# Altium PCB PCB_V1.0.PcbDoc (part 1 of 3)
Units mil, origin at the board's own origin, x right, y up, seen from the top; angles counter-clockwise.
Board outline 2129.51 x 1160.38 mil, 4 copper layers (L1, L2(GND), L3(PWR), L4), stack 62.45 mil thick; 40 components, 40 nets, 186 pads, 192 vias.
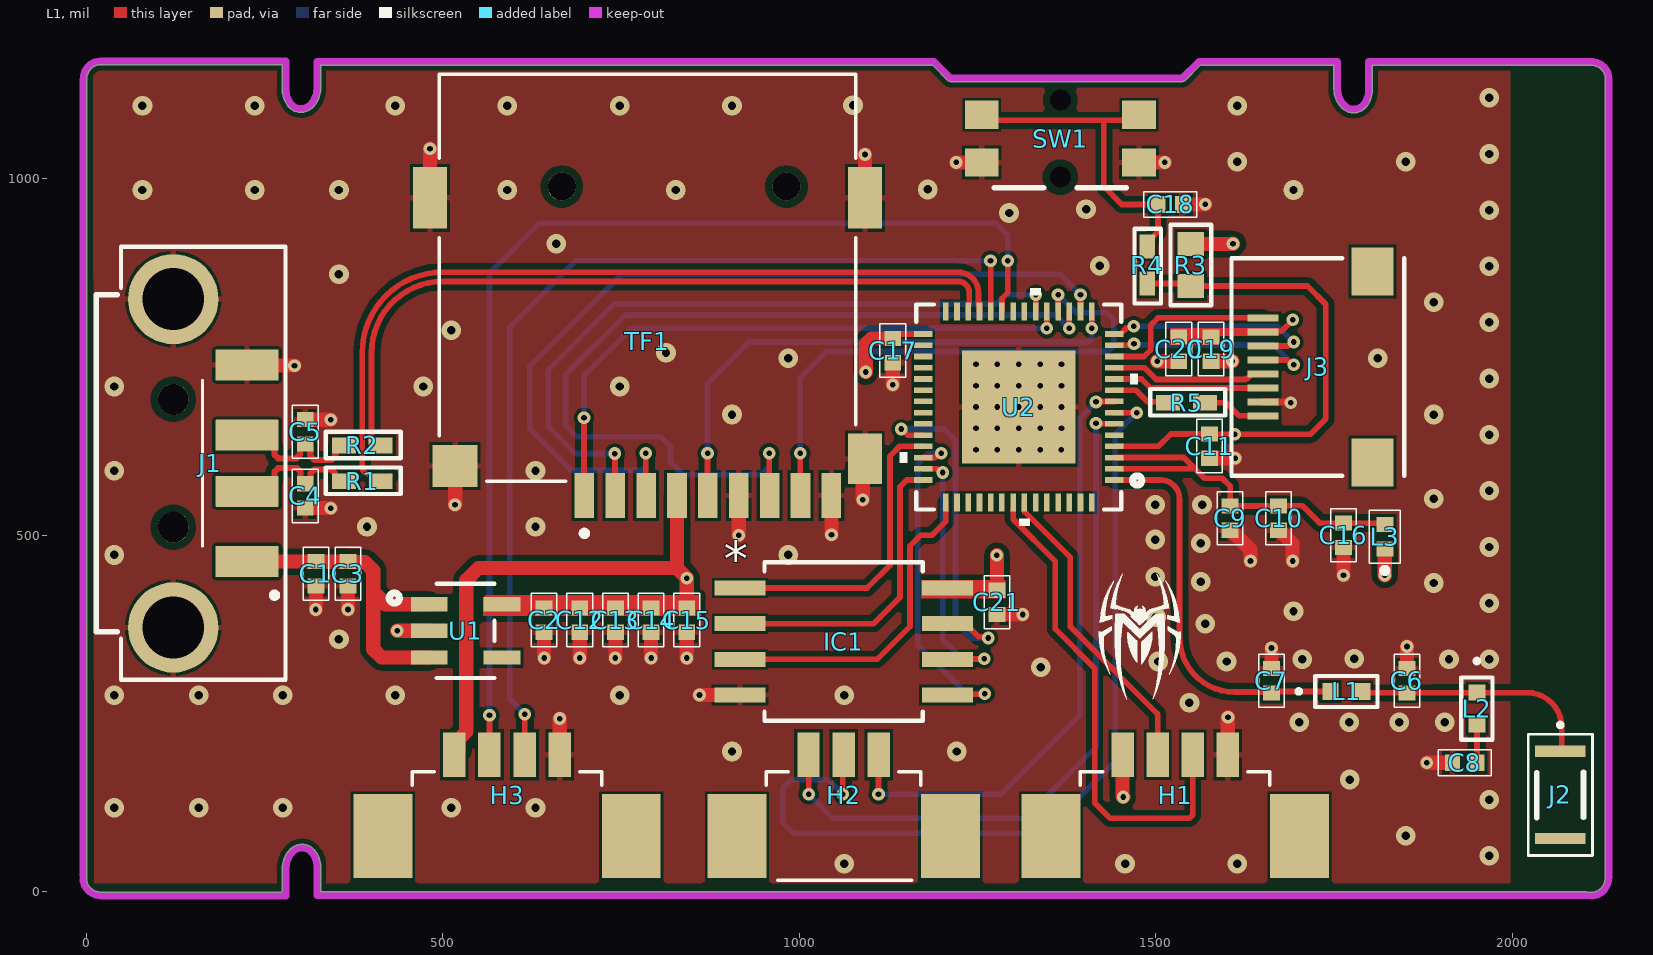
[diagram p0: L1 view]
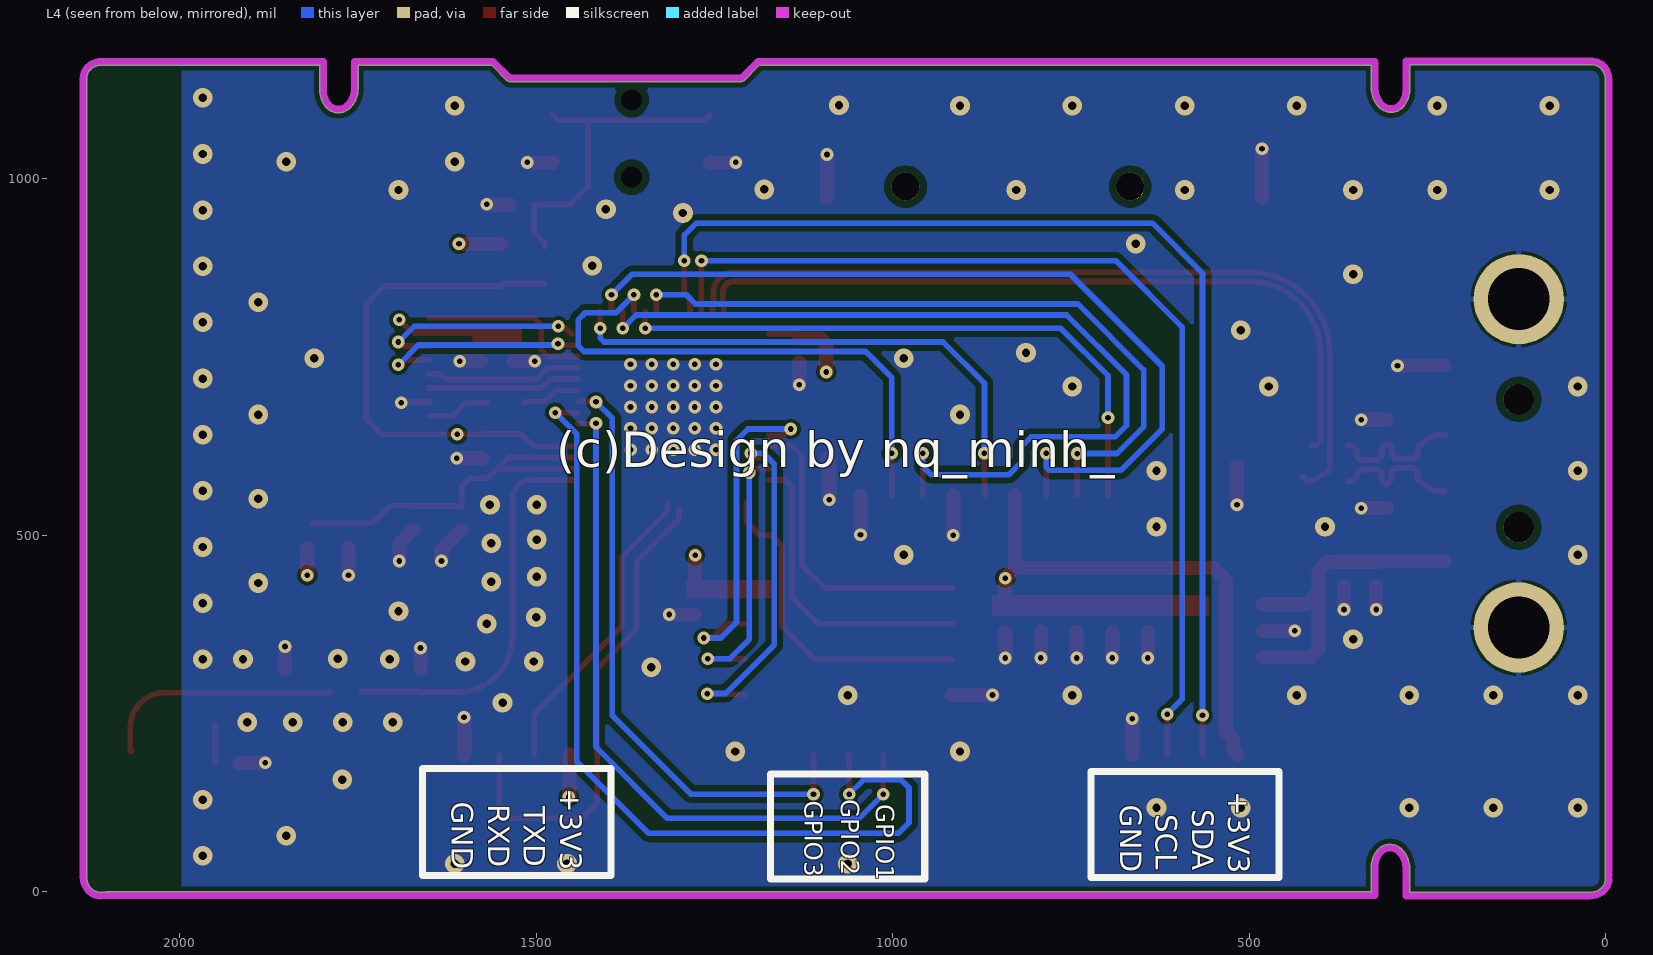
[diagram p1: L4 view, seen from below]
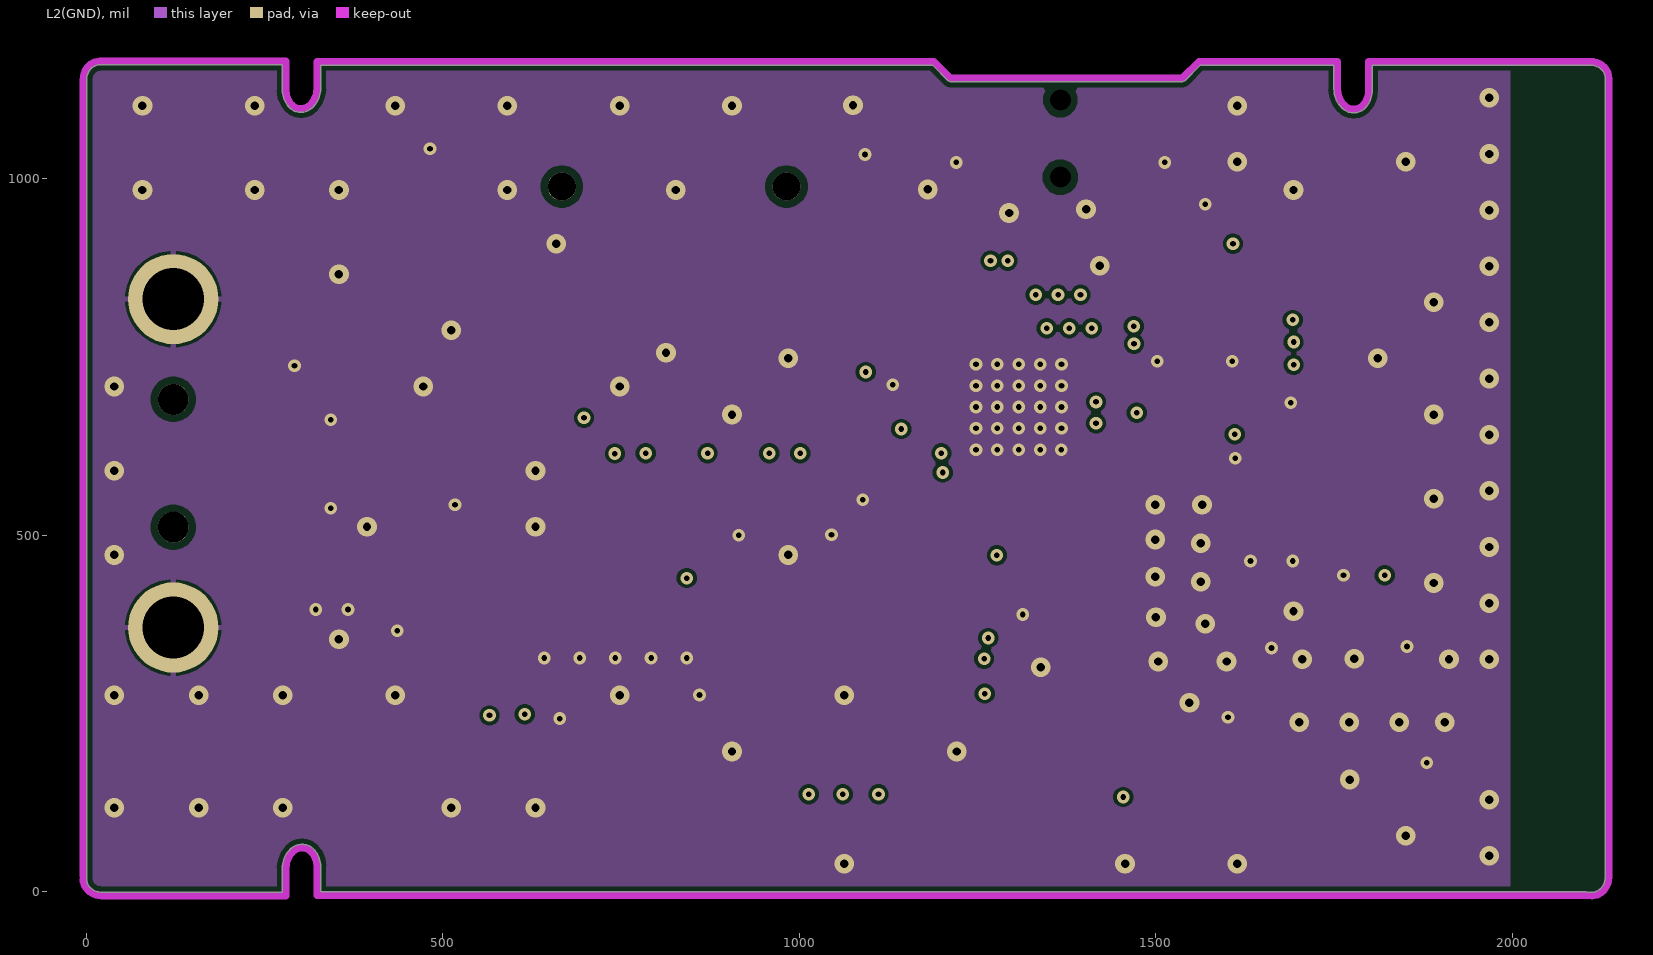
[diagram p2: L2(GND)]
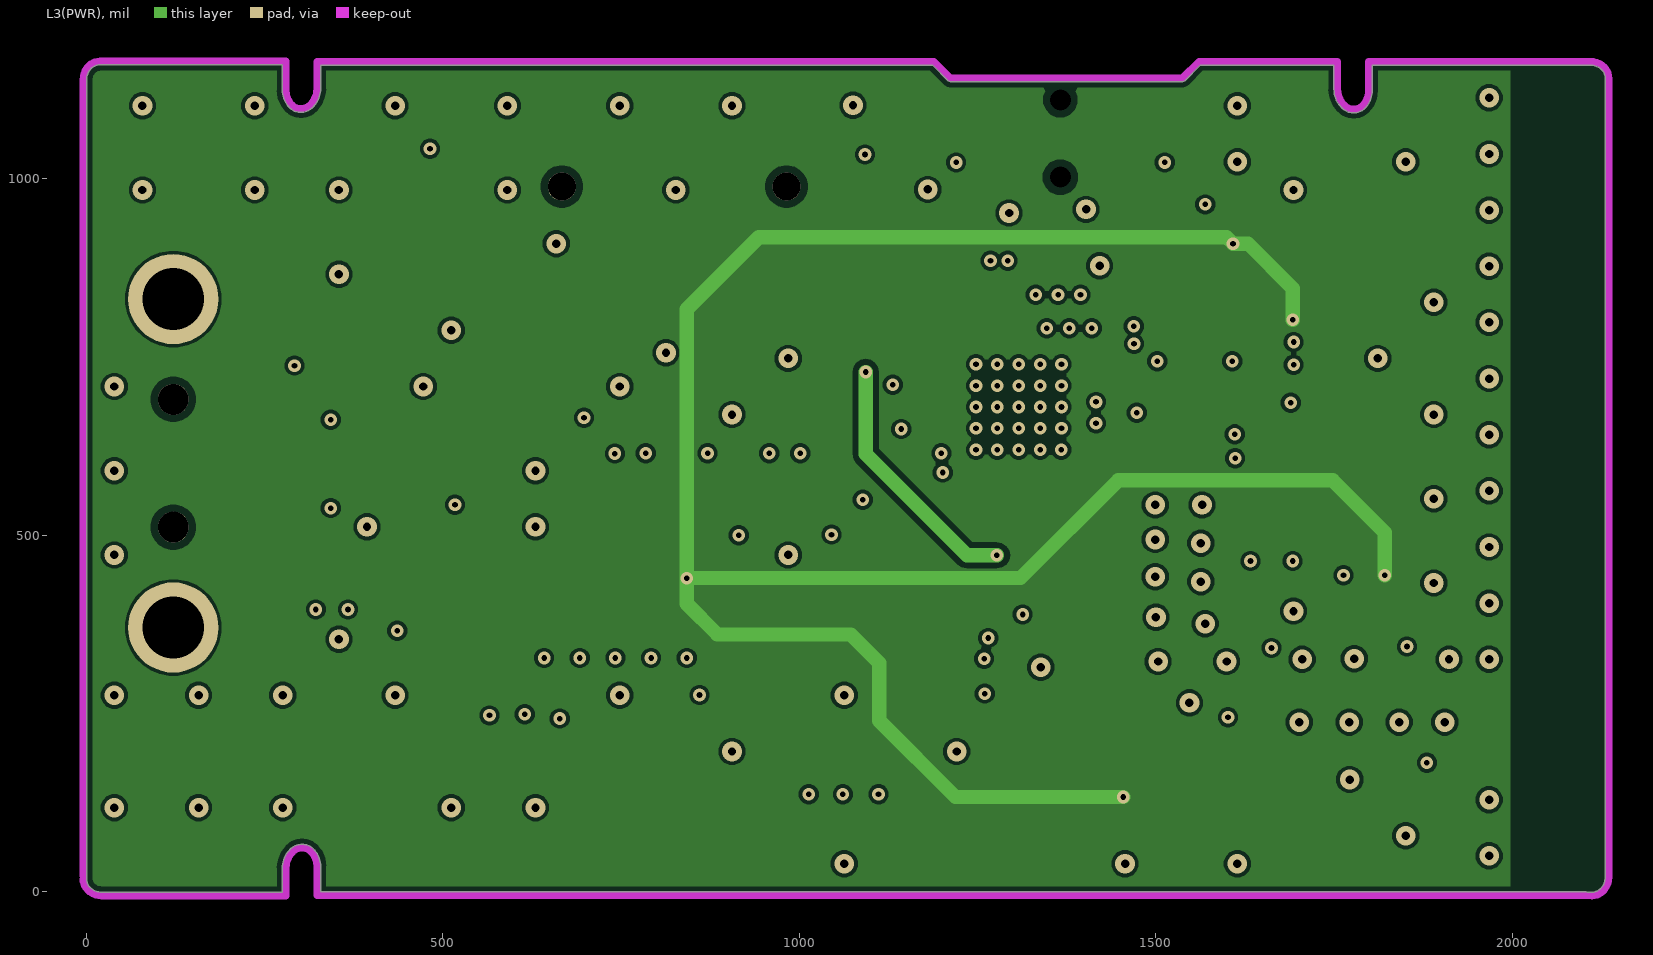
[diagram p3: L3(PWR)]

## Layer stack, top to bottom
Top Solder: solder mask 0.4, Solder Resist, Dk 3.5
L1: signal copper 1.38
Dielectric 2: prepreg 8.28, 7628, Dk 4.1
L2(GND): signal copper 0.6
Core: core 41.93, FR-4, Dk 4.8
L3(PWR): signal copper 0.6
Dielectric 3: prepreg 8.28, 7628, Dk 4.1
L4: signal copper 1.38
Bottom Solder: solder mask 0.4, Solder Resist, Dk 3.5

## Board outline
0.47,18.21 ccw(c17.69,18.21) 5.52,6.03 5.54,6.01 ccw(c21.28,21.8) 21.28,-0.5 275.02,-0.5 275.02,33.39 cw(c312.11,33.39) 285.89,59.62 cw(c302.97,42.53) 302.97,66.69 cw(c302.97,44.61) 318.58,60.22 cw(c294.35,35.99) 328.62,35.99 328.62,-0.12 2103.11,-0.12 2105.02,-0.5 2111.28,-0.5 ccw(c2111.28,16.72) 2123.45,4.55 2123.47,4.57 ccw(c2107.69,20.31) 2129.99,20.31 2129.98,1142.7 ccw(c2112.89,1140.66) 2125.06,1152.84 2125.04,1152.86 ccw(c2109.29,1137.07) 2109.29,1159.37 1803.19,1159.37 1803.19,1123.07 cw(c1768.92,1123.07) 1793.15,1098.84 cw(c1777.54,1114.45) 1777.54,1092.37 cw(c1777.54,1116.52) 1760.46,1099.44 cw(c1786.68,1125.67) 1749.59,1125.67 1749.59,1159.37 1562.46,1159.37 1540.55,1137.45 1537,1135.98 1212,1135.98 1208.45,1137.45 1186.54,1159.37 328.62,1159.37 328.62,1126.48 cw(c291.54,1126.48) 317.76,1100.25 cw(c300.68,1117.34) 300.68,1093.18 cw(c300.68,1115.26) 285.06,1099.65 cw(c309.3,1123.88) 275.02,1123.89 275.02,1159.88 19.33,1159.88 ccw(c19.33,1142.66) 7.15,1154.84 7.13,1154.82 ccw(c22.92,1139.07) 0.62,1139.07

## Design rules (kind name [scope] priority, off if disabled: settings)
BoardOutlineClearance [All] p1: gap=7.87 ignorepadtopadclearanceinfootprint=FALSE
Clearance [All] p1: gap=4 ignorepadtopadclearanceinfootprint=FALSE except(5: Arc-Via Track-Via SMDPad-Via THPad-Via Via-Via Via-Fill Via-Poly Via-Region Via-Text; 8: Arc-Fill Arc-Poly Arc-Region Track-Fill Track-Poly Track-Region Fill-Fill Fill-Poly Fill-Region Poly-Poly Poly-Region Region-Region; 9.84: Arc-Hole Track-Hole SMDPad-Hole THPad-Hole Via-Hole Fill-Hole Poly-Hole Region-Hole Text-Hole)
ComponentClearance [All] p1: gap=4 collisioncheckmode=3 verticalgap=4 showdistances=TRUE
DiffPairsRouting DiffPairsRouting_90 [All] p1: maxlimit=10 minlimit=5 mostfreqgap=5 toplayer_minwidth=8 toplayer_maxwidth=15 toplayer_prefwidth=8.5 midlayer1_minwidth=8 midlayer1_maxwidth=15 midlayer1_prefwidth=8.5 midlayer2_minwidth=8 midlayer2_maxwidth=15 midlayer2_prefwidth=8.5 bottomlayer_minwidth=8 bottomlayer_maxwidth=15 bottomlayer_prefwidth=8.5 maxuncoupledlength=500
DiffPairsRouting [All] p2: maxlimit=4 minlimit=4 mostfreqgap=4 toplayer_minwidth=4 toplayer_maxwidth=71497.94 toplayer_prefwidth=4 midlayer1_minwidth=4 midlayer1_maxwidth=71497.94 midlayer1_prefwidth=4 midlayer2_minwidth=4 midlayer2_maxwidth=71497.94 midlayer2_prefwidth=4 bottomlayer_minwidth=4 bottomlayer_maxwidth=71497.94 bottomlayer_prefwidth=4 maxuncoupledlength=500
Height [All] p1: minheight=0 maxheight=71497.94 prefheight=500
HoleSize [All] p1: absolutevalues=TRUE maxlimit=248.03 minlimit=7.87 maxpercent=80.000 minpercent=20.000
HoleToHoleClearance [All] p1: gap=9.84 allowstackedmicrovias=FALSE
MinimumAnnularRing [All] p1: minimumring=3
MinimumSolderMaskSliver [All] p1: minsoldermaskwidth=0
PlaneClearance [All] p1: clearance=6
PlaneConnect PlaneConnectPowerPads [InPadClass('PowerPads')] p1: planeconnectstyle=Direct reliefexpansion=20 reliefentries=4 reliefconductorwidth=10 reliefairgap=10
PlaneConnect [All] p2: pad.planeconnectstyle=Relief pad.reliefexpansion=11.81 pad.reliefentries=4 pad.reliefconductorwidth=4 pad.reliefairgap=4 via.planeconnectstyle=Direct via.reliefexpansion=11.81 via.reliefentries=4 via.reliefconductorwidth=5 via.reliefairgap=5
PolygonConnect PolygonConnectPowerPads [All vs (InPadClass('PowerPads'))] p1: connectstyle=Direct reliefconductorwidth=10 reliefentries=4 polygonreliefangle="90 Angle" airgapwidth=10
PolygonConnect [All] p2: thpad.connectstyle=Relief thpad.reliefconductorwidth=8 thpad.reliefentries=4 thpad.polygonreliefangle="90 Angle" thpad.airgapwidth=4 smdpad.connectstyle=Relief smdpad.reliefconductorwidth=8 smdpad.reliefentries=4 smdpad.polygonreliefangle="90 Angle" smdpad.airgapwidth=4 via.connectstyle=Direct via.reliefconductorwidth=5 via.reliefentries=4 via.polygonreliefangle="90 Angle" via.airgapwidth=5
RoutingVias [All] p1: holewidth=7.87 width=17.72 viastyle="Through Hole" minholewidth=7.87 minwidth=17.72 maxholewidth=248.03 maxwidth=257.87
SilkToSilkClearance [All] p1: silktosilkclearance=0
SilkToSolderMaskClearance [IsPad] p1: minsilkscreentomaskgap=4 clearancetoexposedcopper=TRUE
SolderMaskExpansion [All] p1: expansion=2.95 istentingtop=FALSE
SupplyNets "Schematic Supply Nets_5" [InNet('+3V3')] p1: voltage=0.000
SupplyNets "Schematic Supply Nets_3" [InNet('P3V3')] p2: voltage=0.000
SupplyNets "Schematic Supply Nets_2" [InNet('GND')] p3: voltage=0.000
SupplyNets "Schematic Supply Nets_1" [InNet('VDD_SPI')] p4: voltage=0.000
SupplyNets "Schematic Supply Nets" [InNet('+5V_USB')] p5: voltage=0.000
Width [All] p1: maxlimit=71497.94 minlimit=5 preferedwidth=8
20 further rules are at their usual default settings.

## Classes and differential pairs
differential pair class "Diff 90": USB USB_D
component class USB_and_POWER: C1 C2 C3 C4 C5 J1 R1 R2 U1
component class SD_Card: TF1
component class MCU_and_Antenna: C6 C7 C8 C9 C10 C11 C12 C13 C14 C15 C16 C17 C18 H1 H2 H3 J2 L1 L2 L3 R3 R4 SW1 U2
component class EEPROM: C21 IC1
component class Display: C19 C20 Display1 J3 R5
differential pair USB: +USB_P -USB_N
differential pair USB_D: +USB_D_P -USB_D_N

## Components (designator, comment, footprint, x,y, rotation, side; value= is the part's Value field where it differs from the comment)
C1 "GRM155R71C104KA88D" CAPC1005X55N 322,446 r90 top value=100nF
C2 "GRM155R60J106ME15D" CAPC1005X55N 642,381 r90 top value=10µF
C3 "GRM155R60J106ME15D" CAPC1005X55N 367,446 r90 top value=10µF
C4 "GRM155R60J106ME15D" CAPC1005X55N 307,555.17 r90 top value=10µF
C5 "GRM155R60J106ME15D" CAPC1005X55N 307,645.17 r270 top value=10µF
C6 "GJM1555C1H1R3BB01D" CAPC1005X55N 1852,296 r270 top value=1.3pF
C7 "GJM1555C1H1R2WB01D" CAPC1005X55N 1662,296 r270 top value=1.2pF
C8 "C0402-NC" "CAPC1005X55N - NC" 1933,181 r0 top
C9 "GRM155R71C104KA88D" CAPC1005X55N 1604,524 r270 top value=100nF
C10 "GRM155R71C104KA88D" CAPC1005X55N 1672,524 r270 top value=100nF
C11 "GRM155R71C104KA88D" CAPC1005X55N 1575,625 r270 top value=100nF
C12 "CL05A105KP5NNNC" CAPC1005X55N 692,381 r90 top value=1µF
C13 "CL05A105KP5NNNC" CAPC1005X55N 742,381 r90 top value=1µF
C14 "CL05A105KP5NNNC" CAPC1005X55N 792,381 r90 top value=1µF
C15 "GRM155R60J106ME15D" CAPC1005X55N 842,381 r90 top value=10µF
C16 "GRM155R71C104KA88D" CAPC1005X55N 1763,500 r270 top value=100nF
C17 "GRM155R60J106ME15D" CAPC1005X55N 1131,759 r90 top value=10µF
C18 "CL05A105KP5NNNC" CAPC1005X55N 1520,964 r0 top value=1µF
C19 "GRM155R60J106ME15D" CAPC1005X55N 1577,761 r90 top value=10µF
C20 "GRM155R71C104KA88D" CAPC1005X55N 1532,761 r270 top value=100nF
C21 "GRM155R60J106ME15D" CAPC1005X55N 1277,406 r90 top value=10µF
H1 "10114830-10104LF" AMPHENOL_10114830-10104LF 1527,86 r0 top
H2 "10114830-11103LF" AMPHENOL_10114830-11103LF 1062,86 r0 top
H3 "10114830-10104LF" AMPHENOL_10114830-10104LF 590,86 r0 top
IC1 "W25Q128JVSIQ TR" SOIC_208MIL_WIN-M 1062,351 r0 top
J1 "USB-AM-S-S-B-SM1" SAMTEC_USB-AM-S-X-X-SM1 122,601 r270 top
J2 "RF Antennas" ANT3216LL00R2400A 2067,136 r270 top
J3 "XF2M-0815-1A" "FPC CONNECTOR 8PIN, PITCH 0.5MM + MODULE_DISPLAY 1.14 INCH" 1727,736 r270 top
L1 "MHQ1005P2N7CT000" IND_1005_TDK 1767,281 r0 top value=2.7nH
L2 "L0402_NC" IND_1005_TDK_NC 1950,257 r270 top
L3 "LQG15HN2N0C02D" INDC1005X55N 1821,498 r270 top value=2nH
R1 "RC0402JR-070RL" RC0402N_YAG-M 387,576 r0 top value=0Ω
R2 "RC0402JR-070RL" RC0402N_YAG-M 387,626 r0 top value=0Ω
R3 "CRCW060310K0FKEA" RES_CRCW_0603 1549,879 r270 top value=10kΩ
R4 "RC0402JR-070RL" RC0402N_YAG-M 1488,879 r270 top value=0Ω
R5 "RC0402JR-070RL" RC0402N_YAG-M 1543,686 r0 top value=0Ω
SW1 "436331045822" 436331045822 1366,1076 r180 top
TF1 "SDCard Connetor_MSD-1-A" CUI_MSD-1-A 787,861 r180 top locked
U1 "MIC5504-3.3YM5-TR" SOT-23-5_MC_MCH 532,366 r0 top
U2 "ESP32-S3-PICO-1-N8R2" QFN56_7X7_EXP-L 1307.63,679.86 r180 top

## Footprints (in the part's own frame and the unit in brackets; to place one, negate y for a bottom-side part, rotate by r counter-clockwise, add the part's x,y. Pads: shape width x height; smd on the part's side, far side on the other; paste and mask are expansions set on the pad)
436331045822 [mm]
  rect 1.2x1 smd: 1(2.8,1.35) 2(2.8,-0.35) 3(-2.8,1.35) 4(-2.8,-0.35)
  round 0.375 hole 0.75 unplated: MH1(0,1.875) MH2(0,-0.875)
  silkscreen extent -2.35,2.25 2.35,2.25, body extent -3.2,-2.24 3.2,2.26, height 1.65
AMPHENOL_10114830-10104LF [mm]
  rect 0.8x1.6 smd: 1(-1.875,2.7) 2(-0.625,2.7) 3(0.625,2.7) 4(1.875,2.7)
  rect 2.1x3 smd: SH1(-4.425,-0.2) SH2(4.425,-0.2)
  silkscreen extent -3.37,1.61 3.37,2.1, body extent -5.07,-2.1 5.07,3.2, height 3.4
AMPHENOL_10114830-11103LF [mm]
  rect 0.8x1.6 smd: 1(-1.25,2.7) 2(0,2.7) 3(1.25,2.7)
  rect 2.1x3 smd: SH1(-3.8,-0.2) SH2(3.8,-0.2)
  silkscreen extent -2.75,-1.78 2.75,2.1, body extent -4.45,-2.1 4.45,3.2, height 3.4
ANT3216LL00R2400A [mm]
  rect 0.4x1.8 smd: 1(-1.55,0) 2(1.55,0)
  silkscreen extent -2.54,-1.14 2.16,1.14, body extent -1.6,-0.8 1.6,0.8, height 1.21
CAPC1005X55N [mm]
  rect 0.54x0.6 smd paste+0 mask+0.102: 1(-0.432,0) 2(0.432,0)
  silkscreen extent -0.95,-0.46 0.95,0.46, body extent -0.5,-0.25 0.5,0.25, height 0.55
"CAPC1005X55N - NC" [mm]
  rect 0.54x0.6 smd paste+0 mask+0.102: 1(-0.432,0) 2(0.432,0)
  silkscreen extent -0.95,-0.46 0.95,0.46
CUI_MSD-1-A [mm]
  rect 0.7x1.6 smd: 1(2.25,7.75) 2(1.15,7.75) 3(0.05,7.75) 4(-1.05,7.75) 5(-2.15,7.75) 6(-3.25,7.75) 7(-4.35,7.75) 8(-5.45,7.75) CD(-6.55,7.75)
  rect 1.2x1.8 smd: G1(-7.75,6.45)
  rect 1.6x1.5 smd: G2(6.85,6.7)
  rect 1.2x2.2 smd: G3(-7.75,-2.85) G4(7.75,-2.85)
  round 1 hole 1 unplated: ""(-4.95,-3.25) ""(3.05,-3.25)
  silkscreen extent -7.42,-7.25 7.42,9.2, body extent -8.02,-7.3 8.12,7.75, height 1.86
"FPC CONNECTOR 8PIN, PITCH 0.5MM + MODULE_DISPLAY 1.14 INCH" [mm]
  rect 0.25x1.1 smd paste+0 mask+0: 1(1.75,-1.95) 2(1.25,-1.95) 3(0.75,-1.95) 4(0.25,-1.95) 5(-0.25,-1.95) 6(-0.75,-1.95) 7(-1.25,-1.95) 8(-1.75,-1.95)
  rect 1.7x1.5 smd paste-0.85 mask-0.851: 9(3.4,1.95) 10(-3.4,1.95)
  silkscreen extent -3.88,-3.08 3.88,3.08, body extent -9.62,-3.04 9.77,57.84, height 2.29
IND_1005_TDK [mm]
  rect 0.576x0.6 smd paste+0 mask+0: 1(-0.568,0) 2(0.568,0)
  silkscreen extent -1.77,-0.55 1.11,0.55, body extent -0.5,-0.3 0.5,0.3, height 0.5
IND_1005_TDK_NC [mm]
  rect 0.576x0.6 smd paste+0 mask+0: 1(-0.568,0) 2(0.568,0)
  silkscreen extent -1.77,-0.55 1.11,0.55
INDC1005X55N [mm]
  rect 0.54x0.6 smd: 1(-0.432,0) 2(0.432,0)
  silkscreen extent -0.95,-0.55 1.3,0.55, body extent -0.5,-0.28 0.5,0.27, height 0.51
QFN56_7X7_EXP-L [mm]
  rect 0.65x0.2 smd paste+0 mask+0: 1(-3.4,2.6) 2(-3.4,2.2) 3(-3.4,1.8) 4(-3.4,1.4) 5(-3.4,1) 6(-3.4,0.6) 7(-3.4,0.2) 8(-3.4,-0.2) 9(-3.4,-0.6) 10(-3.4,-1) 11(-3.4,-1.4) 12(-3.4,-1.8) 13(-3.4,-2.2) 14(-3.4,-2.6) 29(3.4,-2.6) 30(3.4,-2.2) 31(3.4,-1.8) 32(3.4,-1.4) 33(3.4,-1) 34(3.4,-0.6) 35(3.4,-0.2) 36(3.4,0.2) 37(3.4,0.6) 38(3.4,1) 39(3.4,1.4) 40(3.4,1.8) 41(3.4,2.2) 42(3.4,2.6)
  rect 0.2x0.65 smd paste+0 mask+0: 15(-2.6,-3.4) 16(-2.2,-3.4) 17(-1.8,-3.4) 18(-1.4,-3.4) 19(-1,-3.4) 20(-0.6,-3.4) 21(-0.2,-3.4) 22(0.2,-3.4) 23(0.6,-3.4) 24(1,-3.4) 25(1.4,-3.4) 26(1.8,-3.4) 27(2.2,-3.4) 28(2.6,-3.4) 43(2.6,3.4) 44(2.2,3.4) 45(1.8,3.4) 46(1.4,3.4) 47(1,3.4) 48(0.6,3.4) 49(0.2,3.4) 50(-0.2,3.4) 51(-0.6,3.4) 52(-1,3.4) 53(-1.4,3.4) 54(-1.8,3.4) 55(-2.2,3.4) 56(-2.6,3.4)
  rect 4.039x4.039 smd paste-2.019 mask+0: 57(0,0)
  silkscreen extent -4.38,-4.23 4.23,4.23, body extent -3.52,-3.52 3.52,3.52, height 0.89
RC0402N_YAG-M [mil]
  rect 33.65x21.97 smd paste+0 mask+0: 1(-25.83,0) 2(25.83,0)
  silkscreen extent -51,-18 54,19, body extent -20,-10 20,10, height 16
RES_CRCW_0603 [mil]
  rect 33.78x37 smd paste+0 mask+0: 1(-29.39,0) 2(29.39,0)
  silkscreen extent -56,-29 56,29, body extent -33,-19 33,19, height 20
SAMTEC_USB-AM-S-X-X-SM1 [mm]
  rrect4% 1.1x2.25 smd: 01(3.5,2.625) 02(1,2.625) 03(-1,2.625) 04(-3.5,2.625)
  round 3.216 hole 2.2: S1(-5.85,0) S2(5.85,0)
  round 1.1 hole 1.1 unplated: ""(-2.275,0) ""(2.275,0)
  silkscreen extent -7.71,-2.75 7.71,4, body extent -6.35,-17.7 6.35,3.45, height 3.1
SOIC_208MIL_WIN-M [mil]
  rect 71.37x20.97 smd paste+0 mask+0: 1(-145.47,75) 2(-145.47,25) 3(-145.47,-25) 4(-145.47,-75) 5(145.47,-75) 6(145.47,-25) 7(145.47,25) 8(145.47,75)
  silkscreen extent -111,-111 111,111, body extent -159,-106 159,106, height 85
SOT-23-5_MC_MCH [mil]
  rect 51.56x20 smd paste+0 mask+0: 1(-51,37.4) 2(-51,0) 3(-51,-37.4) 4(51,-37.4) 5(51,37.4)
  silkscreen extent -107,-66 40,66, body extent -63,-61 63,61, height 57

## Part data
C1 C9 C10 C11 C16 C20: "16V 100nF X7R ±10% 0402 Multilayer Ceramic Capacitors MLCC - SMD/SMT ROHS", Case Code (Imperial)=0402, Case Code (Metric)=1005, Dielectric=X7R, Dielectric Material=Ceramic, Insulation Resistance=10GΩ, Manufacturer=Murata, Manufacturer Lifecycle Status=NRND, Max Operating Temperature=125°C, Min Operating Temperature=-55°C, Supplier Part Number=490-3261-1-ND, Tolerance=10%, Voltage=16V, Case/Package=0402, Category="Ceramic Capacitors", ComponentLink1Description=https://datasheet.octopart.com:443/GRM155R71C104KA88D-Murata-datasheet-6387203.pdf?src-supplier=Upverter, ComponentLink1URL=https://datasheet.octopart.com:443/GRM155R71C104KA88D-Murata-datasheet-6387203.pdf?src-supplier=Upverter, ComponentLink2Description=https://datasheet.octopart.com:443/GRM155R71C104KA88D-Murata-datasheet-501912.pdf?src-supplier=Farnell, ComponentLink2URL=https://datasheet.octopart.com:443/GRM155R71C104KA88D-Murata-datasheet-501912.pdf?src-supplier=Farnell, ComponentLink3Description=https://datasheet.octopart.com:443/GRM155R71C104KA88D-Murata-datasheet-62320226.pdf?src-supplier=Farnell, ComponentLink3URL=https://datasheet.octopart.com:443/GRM155R71C104KA88D-Murata-datasheet-62320226.pdf?src-supplier=Farnell, ComponentLink4Description=https://datasheet.octopart.com:443/GRM155R71C104KA88D-Murata-datasheet-514334.pdf?src-supplier=Farnell, ComponentLink4URL=https://datasheet.octopart.com:443/GRM155R71C104KA88D-Murata-datasheet-514334.pdf?src-supplier=Farnell, ComponentLink5Description=https://datasheet.octopart.com:443/GRM155R71C104KA88D-Murata-datasheet-165579666.pdf?src-supplier=TME, ComponentLink5URL=https://datasheet.octopart.com:443/GRM155R71C104KA88D-Murata-datasheet-165579666.pdf?src-supplier=TME, ComponentLink6Description=https://datasheet.octopart.com:443/GRM155R71C104KA88D-Murata-datasheet-81455578.pdf?src-supplier=TME, ComponentLink6URL=https://datasheet.octopart.com:443/GRM155R71C104KA88D-Murata-datasheet-81455578.pdf?src-supplier=TME, ComponentLink7Description=https://datasheet.octopart.com:443/GRM155R71C104KA88D-Murata-datasheet-59876780.pdf?src-supplier=TME, ComponentLink7URL=https://datasheet.octopart.com:443/GRM155R71C104KA88D-Murata-datasheet-59876780.pdf?src-supplier=TME, ComponentLink8Description=https://datasheet.octopart.com:443/GRM155R71C104KA88D-Murata-datasheet-141266224.pdf?src-supplier=Ciiva, ComponentLink8URL=https://datasheet.octopart.com:443/GRM155R71C104KA88D-Murata-datasheet-141266224.pdf?src-supplier=Ciiva, ComponentLink9Description=https://datasheet.octopart.com:443/GRM155R71C104KA88D-Murata-datasheet-140690972.pdf?src-supplier=Ciiva, ComponentLink9URL=https://datasheet.octopart.com:443/GRM155R71C104KA88D-Murata-datasheet-140690972.pdf?src-supplier=Ciiva, ComponentLink10Description=https://datasheet.octopart.com:443/GRM155R71C104KA88D-Murata-datasheet-138740890.pdf?src-supplier=Ciiva, ComponentLink10URL=https://datasheet.octopart.com:443/GRM155R71C104KA88D-Murata-datasheet-138740890.pdf?src-supplier=Ciiva, ComponentLink11Description=https://datasheet.octopart.com:443/GRM155R71C104KA88D-Murata-datasheet-120101189.pdf?src-supplier=Megastar, ComponentLink11URL=https://datasheet.octopart.com:443/GRM155R71C104KA88D-Murata-datasheet-120101189.pdf?src-supplier=Megastar, ComponentLink12Description=https://datasheet.octopart.com:443/GRM155R71C104KA88D-Murata-datasheet-96971104.pdf?src-supplier=Future+Electronics, ComponentLink12URL=https://datasheet.octopart.com:443/GRM155R71C104KA88D-Murata-datasheet-96971104.pdf?src-supplier=Future+Electronics, ComponentLink13Description=https://datasheet.octopart.com:443/GRM155R71C104KA88D-Murata-datasheet-22122223.pdf?src-supplier=Future+Electronics, ComponentLink13URL=https://datasheet.octopart.com:443/GRM155R71C104KA88D-Murata-datasheet-22122223.pdf?src-supplier=Future+Electronics, ComponentLink14Description=https://datasheet.octopart.com:443/GRM155R71C104KA88D-Murata-datasheet-14400564.pdf?src-supplier=Future+Electronics, ComponentLink14URL=https://datasheet.octopart.com:443/GRM155R71C104KA88D-Murata-datasheet-14400564.pdf?src-supplier=Future+Electronics, ComponentLink15Description=https://datasheet.octopart.com:443/GRM155R71C104KA88D-Murata-datasheet-44106293.pdf?src-supplier=Future+Electronics, ComponentLink15URL=https://datasheet.octopart.com:443/GRM155R71C104KA88D-Murata-datasheet-44106293.pdf?src-supplier=Future+Electronics, ComponentLink16Description=https://datasheet.octopart.com/GRM155R71C104KA88D-Murata-datasheet-12515295.pdf, ComponentLink16URL=https://datasheet.octopart.com/GRM155R71C104KA88D-Murata-datasheet-12515295.pdf, ComponentLink17Description=https://datasheet.octopart.com/GRM155R71C104KA88D-Murata-datasheet-12510076.pdf, ComponentLink17URL=https://datasheet.octopart.com/GRM155R71C104KA88D-Murata-datasheet-12510076.pdf, ComponentLink18Description=https://datasheet.octopart.com/GRM155R71C104KA88D-Murata-datasheet-11978611.pdf, ComponentLink18URL=https://datasheet.octopart.com/GRM155R71C104KA88D-Murata-datasheet-11978611.pdf, ComponentLink19Description=https://datasheet.octopart.com/GRM155R71C104KA88D-Murata-datasheet-10025737.pdf, ComponentLink19URL=https://datasheet.octopart.com/GRM155R71C104KA88D-Murata-datasheet-10025737.pdf, ComponentLink20Description=https://datasheet.octopart.com/GRM155R71C104KA88D-Murata-datasheet-8819587.pdf, ComponentLink20URL=https://datasheet.octopart.com/GRM155R71C104KA88D-Murata-datasheet-8819587.pdf, ComponentLink21Description=https://datasheet.octopart.com/GRM155R71C104KA88D-Murata-datasheet-12555248.pdf, ComponentLink21URL=https://datasheet.octopart.com/GRM155R71C104KA88D-Murata-datasheet-12555248.pdf, ComponentLink22Description=https://datasheet.octopart.com:443/GRM155R71C104KA88D-Murata-datasheet-11864723.pdf?src-supplier=Arrow+Electronics, ComponentLink22URL=https://datasheet.octopart.com:443/GRM155R71C104KA88D-Murata-datasheet-11864723.pdf?src-supplier=Arrow+Electronics, ComponentLink23Description=https://datasheet.octopart.com:443/GRM155R71C104KA88D-Murata-datasheet-148211.pdf?src-supplier=Garrett, ComponentLink23URL=https://datasheet.octopart.com:443/GRM155R71C104KA88D-Murata-datasheet-148211.pdf?src-supplier=Garrett, ComponentLink24Description=https://datasheet.octopart.com:443/GRM155R71C104KA88D-Murata-datasheet-118811.pdf?src-supplier=DigiKey, ComponentLink24URL=https://datasheet.octopart.com:443/GRM155R71C104KA88D-Murata-datasheet-118811.pdf?src-supplier=DigiKey, ComponentLink25Description=https://datasheet.octopart.com:443/GRM155R71C104KA88D-Murata-datasheet-38265814.pdf?src-supplier=Newark, ComponentLink25URL=https://datasheet.octopart.com:443/GRM155R71C104KA88D-Murata-datasheet-38265814.pdf?src-supplier=Newark, ComponentLink26Description=http://sigma.octopart.com:80/reach_statement/Murata-company-16.pdf?src-supplier=Compliance+Statements, ComponentLink26URL=http://sigma.octopart.com:80/reach_statement/Murata-company-16.pdf?src-supplier=Compliance+Statements, Country of Origin="Japan, Mainland China, Philippines, Singapore, Thailand", Depth=500µm, Export Control Classification Number (ECCN) Code=EAR99, Harmonized Tariff Schedule (HTS) Code=8532.24.00.20, Height=500µm, Introduction Date=2004-11-19, Lead Free="Lead Free", Length=1mm, Lifecycle Status=NRND, Manufacturer Part Number=GRM155R71C104KA88D, Material=Ceramic, Mounting Technology="Surface Mount", Number of Terminals=2, Packaging="Cut Tape", Pins=2, Pricing="1=0,1, 10=0,024, 50=0,0156, 100=0,0132, 500=0,00926, 1000=0,00805, 2500=0,00678, 5000=0,00602 (USD)", Radiation Hardening=No, REACH SVHC=Yes, RoHS=Compliant, Schedule B="8532240020, 8532240020|8532240020|8532240020|8532240020|8532240020|8532240020|8532240020|8532240020|8532240020|8532240020|8532240020|8532240020|8532240020, 8532240020|8532240020|8532240020|8532240020|8532240020|8532240020|8532240020|8532240020|8532240020|8532240020|8532240020|8532240020|8532240020|8532240020, 8532240020|8532240020|8532240020|8532240020|8532240020|8532240020|8532240020|8532240020|8532240020|8532240020|8532240020|8532240020|8532240020|8532240020|8532240020", Stock=10363582, Supplier=DigiKey, Termination=SMD/SMT, Thickness=500µm, Voltage Rating=16V, Voltage Rating (DC)=16V, Width=500µm
C2 C3 C4 C5 C15 C17 C19 C21: "6.3V 10uF X5R ±20% 0402 Multilayer Ceramic Capacitors MLCC - SMD/SMT ROHS", Case Code (Imperial)=0402, Case Code (Metric)=1005, Dielectric=X5R, Dielectric Material=Ceramic, LCSC Part=C412251, Manufacturer=Murata, Manufacturer Lifecycle Status="IN PRODUCTION", Max Operating Temperature=85°C, Min Operating Temperature=-55°C, Supplier Part Number=490-13238-6-ND, Tolerance=20%, Voltage Rating=6.3V, Case/Package=0402, Category="Ceramic Capacitors", ComponentLink1Description=https://datasheet.octopart.com:443/GRM155R60J106ME15D-Murata-datasheet-149522992.pdf?src-supplier=Newark, ComponentLink1URL=https://datasheet.octopart.com:443/GRM155R60J106ME15D-Murata-datasheet-149522992.pdf?src-supplier=Newark, ComponentLink2Description=https://datasheet.octopart.com:443/GRM155R60J106ME15D-Murata-datasheet-165579666.pdf?src-supplier=TME, ComponentLink2URL=https://datasheet.octopart.com:443/GRM155R60J106ME15D-Murata-datasheet-165579666.pdf?src-supplier=TME, ComponentLink3Description=https://datasheet.octopart.com:443/GRM155R60J106ME15D-Murata-datasheet-141266224.pdf?src-supplier=Ciiva, ComponentLink3URL=https://datasheet.octopart.com:443/GRM155R60J106ME15D-Murata-datasheet-141266224.pdf?src-supplier=Ciiva, ComponentLink4Description=https://datasheet.octopart.com:443/GRM155R60J106ME15D-Murata-datasheet-140689297.pdf?src-supplier=Ciiva, ComponentLink4URL=https://datasheet.octopart.com:443/GRM155R60J106ME15D-Murata-datasheet-140689297.pdf?src-supplier=Ciiva, ComponentLink5Description=https://datasheet.octopart.com:443/GRM155R60J106ME15D-Murata-datasheet-138740639.pdf?src-supplier=Ciiva, ComponentLink5URL=https://datasheet.octopart.com:443/GRM155R60J106ME15D-Murata-datasheet-138740639.pdf?src-supplier=Ciiva, ComponentLink6Description=https://datasheet.octopart.com:443/GRM155R60J106ME15D-Murata-datasheet-102370999.pdf?src-supplier=HQonline, ComponentLink6URL=https://datasheet.octopart.com:443/GRM155R60J106ME15D-Murata-datasheet-102370999.pdf?src-supplier=HQonline, ComponentLink7Description=https://datasheet.octopart.com/GRM155R60J106ME15D-Murata-datasheet-12515295.pdf, ComponentLink7URL=https://datasheet.octopart.com/GRM155R60J106ME15D-Murata-datasheet-12515295.pdf, ComponentLink8Description=https://datasheet.octopart.com/GRM155R60J106ME15D-Murata-datasheet-12510076.pdf, ComponentLink8URL=https://datasheet.octopart.com/GRM155R60J106ME15D-Murata-datasheet-12510076.pdf, ComponentLink9Description=https://datasheet.octopart.com/GRM155R60J106ME15D-Murata-datasheet-11978611.pdf, ComponentLink9URL=https://datasheet.octopart.com/GRM155R60J106ME15D-Murata-datasheet-11978611.pdf, ComponentLink10Description=https://datasheet.octopart.com/GRM155R60J106ME15D-Murata-datasheet-10025737.pdf, ComponentLink10URL=https://datasheet.octopart.com/GRM155R60J106ME15D-Murata-datasheet-10025737.pdf, ComponentLink11Description=https://datasheet.octopart.com/GRM155R60J106ME15D-Murata-datasheet-8819587.pdf, ComponentLink11URL=https://datasheet.octopart.com/GRM155R60J106ME15D-Murata-datasheet-8819587.pdf, ComponentLink12Description=http://sigma.octopart.com:80/reach_statement/Murata-company-16.pdf?src-supplier=Compliance+Statements, ComponentLink12URL=http://sigma.octopart.com:80/reach_statement/Murata-company-16.pdf?src-supplier=Compliance+Statements, Height=500µm, Length=1mm, Lifecycle Status=Production, Manufacturer Part Number=GRM155R60J106ME15D, Material=Ceramic, Mounting Technology="Surface Mount", Number of Terminals=2, Pricing="1=0,16, 10=0,088, 50=0,0618, 100=0,0538, 500=0,04036, 1000=0,03624, 2500=0,0319, 5000=0,02929 (USD)", REACH SVHC=Yes, RoHS=Compliant, Schedule B="8532240020, 8532240020|8532240020, 8532240020|8532240020|8532240020, 8532240020|8532240020|8532240020|8532240020", Stock=101484, Supplier=DigiKey, Thickness=500µm, Voltage Rating (DC)=6.3V, Width=500µm
C6: "50V 1.3pF C0G 0402 Multilayer Ceramic Capacitors MLCC - SMD/SMT ROHS", Case Code (Imperial)=0402, Case Code (Metric)=1005, Dielectric=C0G, Dielectric Material=Ceramic, LCSC Part=C161309, Manufacturer=Murata, Manufacturer Lifecycle Status="IN PRODUCTION", Max Operating Temperature=125°C, Min Operating Temperature=-55°C, Supplier Part Number=490-8086-1-ND, Temperature Coefficient=30ppm/°C, Voltage Rating=50V, Case/Package=0402, Category="Ceramic Capacitors", ComponentLink1Description=https://datasheet.octopart.com:443/GJM1555C1H1R3BB01D-Murata-datasheet-12515636.pdf?src-supplier=_legacy+Avnet, ComponentLink1URL=https://datasheet.octopart.com:443/GJM1555C1H1R3BB01D-Murata-datasheet-12515636.pdf?src-supplier=_legacy+Avnet, ComponentLink2Description=https://datasheet.octopart.com:443/GJM1555C1H1R3BB01D-Murata-datasheet-165579666.pdf?src-supplier=TME, ComponentLink2URL=https://datasheet.octopart.com:443/GJM1555C1H1R3BB01D-Murata-datasheet-165579666.pdf?src-supplier=TME, ComponentLink3Description=https://datasheet.octopart.com:443/GJM1555C1H1R3BB01D-Murata-datasheet-12511495.pdf?src-supplier=TME, ComponentLink3URL=https://datasheet.octopart.com:443/GJM1555C1H1R3BB01D-Murata-datasheet-12511495.pdf?src-supplier=TME, ComponentLink4Description=https://datasheet.octopart.com:443/GJM1555C1H1R3BB01D-Murata-datasheet-141266224.pdf?src-supplier=Ciiva, ComponentLink4URL=https://datasheet.octopart.com:443/GJM1555C1H1R3BB01D-Murata-datasheet-141266224.pdf?src-supplier=Ciiva, ComponentLink5Description=https://datasheet.octopart.com:443/GJM1555C1H1R3BB01D-Murata-datasheet-140665301.pdf?src-supplier=Ciiva, ComponentLink5URL=https://datasheet.octopart.com:443/GJM1555C1H1R3BB01D-Murata-datasheet-140665301.pdf?src-supplier=Ciiva, ComponentLink6Description=https://datasheet.octopart.com:443/GJM1555C1H1R3BB01D-Murata-datasheet-138724564.pdf?src-supplier=Ciiva, ComponentLink6URL=https://datasheet.octopart.com:443/GJM1555C1H1R3BB01D-Murata-datasheet-138724564.pdf?src-supplier=Ciiva, ComponentLink7Description=https://datasheet.octopart.com:443/GJM1555C1H1R3BB01D-Murata-datasheet-22122223.pdf?src-supplier=Future+Electronics, ComponentLink7URL=https://datasheet.octopart.com:443/GJM1555C1H1R3BB01D-Murata-datasheet-22122223.pdf?src-supplier=Future+Electronics, ComponentLink8Description=https://datasheet.octopart.com:443/GJM1555C1H1R3BB01D-Murata-datasheet-12510170.pdf?src-supplier=Future+Electronics, ComponentLink8URL=https://datasheet.octopart.com:443/GJM1555C1H1R3BB01D-Murata-datasheet-12510170.pdf?src-supplier=Future+Electronics, ComponentLink9Description=https://datasheet.octopart.com:443/GJM1555C1H1R3BB01D-Murata-datasheet-8517407.pdf?src-supplier=Future+Electronics, ComponentLink9URL=https://datasheet.octopart.com:443/GJM1555C1H1R3BB01D-Murata-datasheet-8517407.pdf?src-supplier=Future+Electronics, ComponentLink10Description=https://datasheet.octopart.com:443/GJM1555C1H1R3BB01D-Murata-datasheet-8387045.pdf?src-supplier=Future+Electronics, ComponentLink10URL=https://datasheet.octopart.com:443/GJM1555C1H1R3BB01D-Murata-datasheet-8387045.pdf?src-supplier=Future+Electronics, ComponentLink11Description=https://datasheet.octopart.com:443/GJM1555C1H1R3BB01D-Murata-datasheet-8324201.pdf?src-supplier=Future+Electronics, ComponentLink11URL=https://datasheet.octopart.com:443/GJM1555C1H1R3BB01D-Murata-datasheet-8324201.pdf?src-supplier=Future+Electronics, ComponentLink12Description=https://datasheet.octopart.com:443/GJM1555C1H1R3BB01D-Murata-datasheet-7628724.pdf?src-supplier=Future+Electronics, ComponentLink12URL=https://datasheet.octopart.com:443/GJM1555C1H1R3BB01D-Murata-datasheet-7628724.pdf?src-supplier=Future+Electronics, ComponentLink13Description=https://datasheet.octopart.com:443/GJM1555C1H1R3BB01D-Murata-datasheet-552801.pdf?src-supplier=Future+Electronics, ComponentLink13URL=https://datasheet.octopart.com:443/GJM1555C1H1R3BB01D-Murata-datasheet-552801.pdf?src-supplier=Future+Electronics, ComponentLink14Description=https://datasheet.octopart.com:443/GJM1555C1H1R3BB01D-Murata-datasheet-44781245.pdf?src-supplier=Future+Electronics, ComponentLink14URL=https://datasheet.octopart.com:443/GJM1555C1H1R3BB01D-Murata-datasheet-44781245.pdf?src-supplier=Future+Electronics, ComponentLink15Description=https://datasheet.octopart.com/GJM1555C1H1R3BB01D-Murata-datasheet-12515295.pdf, ComponentLink15URL=https://datasheet.octopart.com/GJM1555C1H1R3BB01D-Murata-datasheet-12515295.pdf, ComponentLink16Description=https://datasheet.octopart.com/GJM1555C1H1R3BB01D-Murata-datasheet-12510076.pdf, ComponentLink16URL=https://datasheet.octopart.com/GJM1555C1H1R3BB01D-Murata-datasheet-12510076.pdf, ComponentLink17Description=https://datasheet.octopart.com/GJM1555C1H1R3BB01D-Murata-datasheet-11978611.pdf, ComponentLink17URL=https://datasheet.octopart.com/GJM1555C1H1R3BB01D-Murata-datasheet-11978611.pdf, ComponentLink18Description=https://datasheet.octopart.com/GJM1555C1H1R3BB01D-Murata-datasheet-10025737.pdf, ComponentLink18URL=https://datasheet.octopart.com/GJM1555C1H1R3BB01D-Murata-datasheet-10025737.pdf, ComponentLink19Description=https://datasheet.octopart.com/GJM1555C1H1R3BB01D-Murata-datasheet-8819587.pdf, ComponentLink19URL=https://datasheet.octopart.com/GJM1555C1H1R3BB01D-Murata-datasheet-8819587.pdf, ComponentLink20Description=https://datasheet.octopart.com/GJM1555C1H1R3BB01D-Murata-datasheet-14405988.pdf, ComponentLink20URL=https://datasheet.octopart.com/GJM1555C1H1R3BB01D-Murata-datasheet-14405988.pdf, ComponentLink21Description=https://datasheet.octopart.com:443/GJM1555C1H1R3BB01D-Murata-datasheet-10124241.pdf?src-supplier=Farnell, ComponentLink21URL=https://datasheet.octopart.com:443/GJM1555C1H1R3BB01D-Murata-datasheet-10124241.pdf?src-supplier=Farnell, ComponentLink22Description=http://sigma.octopart.com:80/reach_statement/Murata-company-16.pdf?src-supplier=Compliance+Statements, ComponentLink22URL=http://sigma.octopart.com:80/reach_statement/Murata-company-16.pdf?src-supplier=Compliance+Statements, Depth=500µm, Export Control Classification Number (ECCN) Code=EAR99, Harmonized Tariff Schedule (HTS) Code=8532.24.00.20, Height=500µm, Introduction Date=2008-02-22, Lead Free="Lead Free", Lead Pitch=300µm, Length=1mm, Lifecycle Status=Production, Manufacturer Part Number=GJM1555C1H1R3BB01D, Material=Ceramic, Mounting Technology="Surface Mount", Number of Terminals=2, Pins=2, Pricing="1=0,1, 10=0,051, 50=0,035, 100=0,0302, 500=0,02198, 1000=0,01946, 2500=0,01682, 5000=0,01524 (USD)", Radiation Hardening=No, REACH SVHC=Yes, RoHS=Compliant, Schedule B="8532240020, 8532240020|8532240020|8532240020|8532240020|8532240020", Stock=147628, Supplier=DigiKey, Termination=SMD/SMT, Thickness=500µm, Voltage Rating (DC)=50V, Width=500µm
C7: "50V 1.2pF C0G 0402 Multilayer Ceramic Capacitors MLCC - SMD/SMT ROHS", Case Code (Imperial)=0402, Case Code (Metric)=1005, Dielectric=C0G, Dielectric Material=Ceramic, LCSC Part=C76899, Manufacturer=Murata, Manufacturer Lifecycle Status="IN PRODUCTION", Max Operating Temperature=125°C, Min Operating Temperature=-55°C, Supplier Part Number=490-11195-1-ND, Temperature Coefficient=30ppm/°C, Voltage=50V, Case/Package=0402, Category="Ceramic Capacitors", ComponentLink1Description=https://datasheet.octopart.com:443/GJM1555C1H1R2WB01D-Murata-datasheet-96711496.pdf?src-supplier=element14+APAC, ComponentLink1URL=https://datasheet.octopart.com:443/GJM1555C1H1R2WB01D-Murata-datasheet-96711496.pdf?src-supplier=element14+APAC, ComponentLink2Description=https://datasheet.octopart.com:443/GJM1555C1H1R2WB01D-Murata-datasheet-165579666.pdf?src-supplier=TME, ComponentLink2URL=https://datasheet.octopart.com:443/GJM1555C1H1R2WB01D-Murata-datasheet-165579666.pdf?src-supplier=TME, ComponentLink3Description=https://datasheet.octopart.com:443/GJM1555C1H1R2WB01D-Murata-datasheet-141266224.pdf?src-supplier=Ciiva, ComponentLink3URL=https://datasheet.octopart.com:443/GJM1555C1H1R2WB01D-Murata-datasheet-141266224.pdf?src-supplier=Ciiva, ComponentLink4Description=https://datasheet.octopart.com:443/GJM1555C1H1R2WB01D-Murata-datasheet-140665300.pdf?src-supplier=Ciiva, ComponentLink4URL=https://datasheet.octopart.com:443/GJM1555C1H1R2WB01D-Murata-datasheet-140665300.pdf?src-supplier=Ciiva, ComponentLink5Description=https://datasheet.octopart.com:443/GJM1555C1H1R2WB01D-Murata-datasheet-138724563.pdf?src-supplier=Ciiva, ComponentLink5URL=https://datasheet.octopart.com:443/GJM1555C1H1R2WB01D-Murata-datasheet-138724563.pdf?src-supplier=Ciiva, ComponentLink6Description=https://datasheet.octopart.com:443/GJM1555C1H1R2WB01D-Murata-datasheet-22122223.pdf?src-supplier=Future+Electronics, ComponentLink6URL=https://datasheet.octopart.com:443/GJM1555C1H1R2WB01D-Murata-datasheet-22122223.pdf?src-supplier=Future+Electronics, ComponentLink7Description=https://datasheet.octopart.com:443/GJM1555C1H1R2WB01D-Murata-datasheet-12510170.pdf?src-supplier=Future+Electronics, ComponentLink7URL=https://datasheet.octopart.com:443/GJM1555C1H1R2WB01D-Murata-datasheet-12510170.pdf?src-supplier=Future+Electronics, ComponentLink8Description=https://datasheet.octopart.com:443/GJM1555C1H1R2WB01D-Murata-datasheet-12510323.pdf?src-supplier=Future+Electronics, ComponentLink8URL=https://datasheet.octopart.com:443/GJM1555C1H1R2WB01D-Murata-datasheet-12510323.pdf?src-supplier=Future+Electronics, ComponentLink9Description=https://datasheet.octopart.com:443/GJM1555C1H1R2WB01D-Murata-datasheet-8517407.pdf?src-supplier=Future+Electronics, ComponentLink9URL=https://datasheet.octopart.com:443/GJM1555C1H1R2WB01D-Murata-datasheet-8517407.pdf?src-supplier=Future+Electronics, ComponentLink10Description=https://datasheet.octopart.com:443/GJM1555C1H1R2WB01D-Murata-datasheet-8387045.pdf?src-supplier=Future+Electronics, ComponentLink10URL=https://datasheet.octopart.com:443/GJM1555C1H1R2WB01D-Murata-datasheet-8387045.pdf?src-supplier=Future+Electronics, ComponentLink11Description=https://datasheet.octopart.com:443/GJM1555C1H1R2WB01D-Murata-datasheet-8324201.pdf?src-supplier=Future+Electronics, ComponentLink11URL=https://datasheet.octopart.com:443/GJM1555C1H1R2WB01D-Murata-datasheet-8324201.pdf?src-supplier=Future+Electronics, ComponentLink12Description=https://datasheet.octopart.com:443/GJM1555C1H1R2WB01D-Murata-datasheet-7628724.pdf?src-supplier=Future+Electronics, ComponentLink12URL=https://datasheet.octopart.com:443/GJM1555C1H1R2WB01D-Murata-datasheet-7628724.pdf?src-supplier=Future+Electronics, ComponentLink13Description=https://datasheet.octopart.com:443/GJM1555C1H1R2WB01D-Murata-datasheet-552801.pdf?src-supplier=Future+Electronics, ComponentLink13URL=https://datasheet.octopart.com:443/GJM1555C1H1R2WB01D-Murata-datasheet-552801.pdf?src-supplier=Future+Electronics, ComponentLink14Description=https://datasheet.octopart.com:443/GJM1555C1H1R2WB01D-Murata-datasheet-44781244.pdf?src-supplier=Future+Electronics, ComponentLink14URL=https://datasheet.octopart.com:443/GJM1555C1H1R2WB01D-Murata-datasheet-44781244.pdf?src-supplier=Future+Electronics, ComponentLink15Description=https://datasheet.octopart.com/GJM1555C1H1R2WB01D-Murata-datasheet-12515295.pdf, ComponentLink15URL=https://datasheet.octopart.com/GJM1555C1H1R2WB01D-Murata-datasheet-12515295.pdf, ComponentLink16Description=https://datasheet.octopart.com/GJM1555C1H1R2WB01D-Murata-datasheet-12510076.pdf, ComponentLink16URL=https://datasheet.octopart.com/GJM1555C1H1R2WB01D-Murata-datasheet-12510076.pdf, ComponentLink17Description=https://datasheet.octopart.com/GJM1555C1H1R2WB01D-Murata-datasheet-11978611.pdf, ComponentLink17URL=https://datasheet.octopart.com/GJM1555C1H1R2WB01D-Murata-datasheet-11978611.pdf, ComponentLink18Description=https://datasheet.octopart.com/GJM1555C1H1R2WB01D-Murata-datasheet-10025737.pdf, ComponentLink18URL=https://datasheet.octopart.com/GJM1555C1H1R2WB01D-Murata-datasheet-10025737.pdf, ComponentLink19Description=https://datasheet.octopart.com/GJM1555C1H1R2WB01D-Murata-datasheet-8819587.pdf, ComponentLink19URL=https://datasheet.octopart.com/GJM1555C1H1R2WB01D-Murata-datasheet-8819587.pdf, ComponentLink20Description=https://datasheet.octopart.com/GJM1555C1H1R2WB01D-Murata-datasheet-14405976.pdf, ComponentLink20URL=https://datasheet.octopart.com/GJM1555C1H1R2WB01D-Murata-datasheet-14405976.pdf, ComponentLink21Description=http://sigma.octopart.com:80/reach_statement/Murata-company-16.pdf?src-supplier=Compliance+Statements, ComponentLink21URL=http://sigma.octopart.com:80/reach_statement/Murata-company-16.pdf?src-supplier=Compliance+Statements, Depth=500µm, Export Control Classification Number (ECCN) Code=EAR99, Harmonized Tariff Schedule (HTS) Code=8532.24.00.20, Height=500µm, Introduction Date=2008-02-22, Lead Free="Lead Free", Length=1mm, Lifecycle Status=Production, Manufacturer Part Number=GJM1555C1H1R2WB01D, Material=Ceramic, Mounting Technology="Surface Mount", Number of Terminals=2, Pricing="1=0,14, 10=0,076, 50=0,0532, 100=0,0462, 500=0,0344, 1000=0,03078, 2500=0,02696, 5000=0,02467 (USD)", Radiation Hardening=No, REACH SVHC=Yes, RoHS=Compliant, Schedule B="8532240020, 8532240020|8532240020|8532240020|8532240020|8532240020", Stock=139087, Supplier=DigiKey, Termination=SMD/SMT, Thickness=500µm, Voltage Rating=50V, Voltage Rating (DC)=50V, Width=500µm
C12 C13 C14 C18: "10V 1uF X5R 卤10% 0402 Multilayer Ceramic Capacitors MLCC - SMD/SMT ROHS", Case Code (Imperial)=0402, Case Code (Metric)=1005, Dielectric=X5R, Dielectric Material=Ceramic, LCSC Part=C14445, Manufacturer="Samsung Electro-Mechanics", Max Operating Temperature=85°C, Min Operating Temperature=-55°C, Supplier Part Number=1276-1076-2-ND, Tolerance=10%, Voltage Rating=10V, Case/Package=0402, Category="Ceramic Capacitors", China RoHS=Compliant, ComponentLink1Description=https://datasheet.octopart.com:443/CL05A105KP5NNNC-Samsung-Electro-Mechanics-datasheet-181960517.pdf?src-supplier=IHS, ComponentLink1URL=https://datasheet.octopart.com:443/CL05A105KP5NNNC-Samsung-Electro-Mechanics-datasheet-181960517.pdf?src-supplier=IHS, ComponentLink2Description=https://datasheet.octopart.com:443/CL05A105KP5NNNC-Samsung-Electro-Mechanics-datasheet-136031721.pdf?src-supplier=Future+Electronics, ComponentLink2URL=https://datasheet.octopart.com:443/CL05A105KP5NNNC-Samsung-Electro-Mechanics-datasheet-136031721.pdf?src-supplier=Future+Electronics, ComponentLink3Description=https://datasheet.octopart.com:443/CL05A105KP5NNNC-Samsung-Electro-Mechanics-datasheet-110226203.pdf?src-supplier=Future+Electronics, ComponentLink3URL=https://datasheet.octopart.com:443/CL05A105KP5NNNC-Samsung-Electro-Mechanics-datasheet-110226203.pdf?src-supplier=Future+Electronics, ComponentLink4Description=https://datasheet.octopart.com:443/CL05A105KP5NNNC-Samsung-Electro-Mechanics-datasheet-81461591.pdf?src-supplier=Future+Electronics, ComponentLink4URL=https://datasheet.octopart.com:443/CL05A105KP5NNNC-Samsung-Electro-Mechanics-datasheet-81461591.pdf?src-supplier=Future+Electronics, ComponentLink5Description=https://datasheet.octopart.com:443/CL05A105KP5NNNC-Samsung-datasheet-42280521.pdf?src-supplier=Future+Electronics, ComponentLink5URL=https://datasheet.octopart.com:443/CL05A105KP5NNNC-Samsung-datasheet-42280521.pdf?src-supplier=Future+Electronics, ComponentLink6Description=https://datasheet.octopart.com:443/CL05A105KP5NNNC-Samsung-datasheet-26589000.pdf?src-supplier=Future+Electronics, ComponentLink6URL=https://datasheet.octopart.com:443/CL05A105KP5NNNC-Samsung-datasheet-26589000.pdf?src-supplier=Future+Electronics, ComponentLink7Description=https://datasheet.octopart.com:443/CL05A105KP5NNNC-Samsung-datasheet-8326907.pdf?src-supplier=Future+Electronics, ComponentLink7URL=https://datasheet.octopart.com:443/CL05A105KP5NNNC-Samsung-datasheet-8326907.pdf?src-supplier=Future+Electronics, ComponentLink8Description=https://datasheet.octopart.com:443/CL05A105KP5NNNC-Samsung-Electro-Mechanics-datasheet-149136634.pdf?src-supplier=Future+Electronics, ComponentLink8URL=https://datasheet.octopart.com:443/CL05A105KP5NNNC-Samsung-Electro-Mechanics-datasheet-149136634.pdf?src-supplier=Future+Electronics, ComponentLink9Description=https://datasheet.octopart.com/CL05A105KP5NNNC-Samsung-Electro-Mechanics-datasheet-97040617.pdf, ComponentLink9URL=https://datasheet.octopart.com/CL05A105KP5NNNC-Samsung-Electro-Mechanics-datasheet-97040617.pdf, ComponentLink10Description=https://datasheet.octopart.com/CL05A105KP5NNNC-Samsung-Electro-Mechanics-datasheet-8324245.pdf, ComponentLink10URL=https://datasheet.octopart.com/CL05A105KP5NNNC-Samsung-Electro-Mechanics-datasheet-8324245.pdf, ComponentLink11Description=https://datasheet.octopart.com:443/CL05A105KP5NNNC-Samsung-Electro-Mechanics-datasheet-11789578.pdf?src-supplier=Arrow+Electronics, ComponentLink11URL=https://datasheet.octopart.com:443/CL05A105KP5NNNC-Samsung-Electro-Mechanics-datasheet-11789578.pdf?src-supplier=Arrow+Electronics, ComponentLink12Description=https://datasheet.octopart.com:443/CL05A105KP5NNNC-Samsung-datasheet-59220082.pdf?src-supplier=TME, ComponentLink12URL=https://datasheet.octopart.com:443/CL05A105KP5NNNC-Samsung-datasheet-59220082.pdf?src-supplier=TME, Contact Plating=Tin, Country of Origin="Mainland China, Philippines, South Korea", Depth=500µm, Export Control Classification Number (ECCN) Code=EAR99, Harmonized Tariff Schedule (HTS) Code=8532.24.00.20, Height=550µm, Introduction Date=2007-12-03, Length=1mm, Lifecycle Status=Production, Manufacturer Part Number=CL05A105KP5NNNC, Material=Ceramic, Mounting Technology="Surface Mount", Number of Terminals=2, Pricing="10000=0,00534, 20000=0,00483, 30000=0,00457, 50000=0,00429, 70000=0,00413, 100000=0,00397 (USD)", Radiation Hardening=No, REACH SVHC=Yes, RoHS=Compliant, Schedule B="8532240020, 8532240020|8532240020|8532240020|8532240020|8532240020, 8532240020|8532240020|8532240020|8532240020|8532240020|8532240020, 8532240020|8532240020|8532240020|8532240020|8532240020|8532240020|8532240020", Stock=6461612, Supplier=DigiKey, Thickness=558.8µm, Voltage Rating (DC)=10V, Width=500µm
H1 H3: "Board Connector, 4 Contact(S), 1 Row(S), Male, Right Angle, 0.049 Inch Pitch, Surface Mount", Color=Natural, Contact Resistance=20mΩ, Current Rating=1A, Dielectric Material="Liquid Crystal Polymer", Flammability Rating="UL94 V-0", Insulation Resistance=100MΩ, LCSC Part=C5407185, Manufacturer="Amphenol Communications Solutions", Max Operating Temperature=105°C, Max Voltage Rating (AC)=125V, Min Operating Temperature=-40°C, Operating Force=29.42N, Supplier Part Number=609-6047-1-ND, Category="Headers and Wire Housings", China RoHS=Compliant, ComponentLink1Description=https://datasheet.octopart.com:443/10114830-10104LF-Amphenol-Communications-Solutions-datasheet-181954850.pdf?src-supplier=IHS, ComponentLink1URL=https://datasheet.octopart.com:443/10114830-10104LF-Amphenol-Communications-Solutions-datasheet-181954850.pdf?src-supplier=IHS, ComponentLink2Description=https://datasheet.octopart.com:443/10114830-10104LF-Amphenol-Communications-Solutions-datasheet-154727257.pdf?src-supplier=Electro+Sonic, ComponentLink2URL=https://datasheet.octopart.com:443/10114830-10104LF-Amphenol-Communications-Solutions-datasheet-154727257.pdf?src-supplier=Electro+Sonic, ComponentLink3Description=https://datasheet.octopart.com:443/10114830-10104LF-FCI-datasheet-11519768.pdf?src-supplier=element14+APAC, ComponentLink3URL=https://datasheet.octopart.com:443/10114830-10104LF-FCI-datasheet-11519768.pdf?src-supplier=element14+APAC, ComponentLink4Description=https://datasheet.octopart.com:443/10114830-10104LF-FCI-datasheet-62311819.pdf?src-supplier=Farnell, ComponentLink4URL=https://datasheet.octopart.com:443/10114830-10104LF-FCI-datasheet-62311819.pdf?src-supplier=Farnell, Connector Type="Male Pin", Contact Gender=Male, Contact Material=Bronze, Contact Plating=Tin, Depth=5.3mm, Export Control Classification Number (ECCN) Code=EAR99, Gender=Male, Harmonized Tariff Schedule (HTS) Code=8536.69.40.40, Housing Color=Natural, Housing Material=Thermoplastic, Introduction Date=2010-12-14, Length=10.15mm, Lifecycle Status=Production, Manufacturer Part Number=10114830-10104LF, Max Current Rating=1A, Mounting Technology="Surface Mount", Number of Contacts=4, Number of Positions=4, Number of Rows=1, Orientation="Right Angle", Pins=4, Pitch=1.2446mm, Plating Thickness=2.54µm, Pricing="1=0,49, 10=0,42, 100=0,3569, 500=0,31854 (USD)", REACH SVHC=Yes, RoHS=Compliant, Schedule B="8536694040, 8536694040|8536694040, 8536694040|8536694040|8536694040, 8536694040|8536694040|8536694040|8536694040", Stock=13344, Supplier=DigiKey, Terminal Pitch=1.25mm, Termination=Solder, Voltage Rating=125V
H2: "WTB 1.25 WAFER 90 SMT-10114830-11103LF", Color=Natural, Contact Resistance=20mΩ, Current Rating=1A, Dielectric Material="Liquid Crystal Polymer", Insulation Resistance=100MΩ, LCSC Part=C5407064, Manufacturer="Amphenol Communications Solutions", Max Operating Temperature=105°C, Min Operating Temperature=-40°C, Operating Force=24.52N, Supplier Part Number=609-10114830-11103LFDKR-ND, Category="Card Edge Connectors", China RoHS=Compliant, ComponentLink1Description=https://datasheet.octopart.com:443/10114830-11103LF-Amphenol-Communications-Solutions-datasheet-181954850.pdf?src-supplier=IHS, ComponentLink1URL=https://datasheet.octopart.com:443/10114830-11103LF-Amphenol-Communications-Solutions-datasheet-181954850.pdf?src-supplier=IHS, Connector Type="Male Pin", Contact Plating=Gold, Gender=Male, Lifecycle Status=Production, Manufacturer Part Number=10114830-11103LF, Mounting Technology="Surface Mount", Number of Positions=3, Number of Rows=1, Orientation="Right Angle", Pitch=1.2446mm, Pricing="1=0,43, 10=0,365, 100=0,3097, 500=0,2764 (USD)", REACH SVHC=Yes, RoHS=Compliant, Stock=6852, Supplier=DigiKey, Terminal Pitch=1.25mm, Termination=Solder
IC1: "NOR Flash Serial (SPI, Dual SPI, Quad SPI) 3V/3.3V 128M-bit 16M x 8 6ns 8-Pin SOIC T/R", Case/Package=SOIC, Frequency=104MHz, LCSC Part=C97521, Manufacturer=Winbond, Max Operating Temperature=85°C, Min Operating Temperature=-40°C, Supplier Part Number=256-W25Q128JVSIQTRCT-ND, Category=Flash, ComponentLink1Description=https://datasheet.octopart.com:443/W25Q128JVSIQ-TR-Winbond-datasheet-138104337.pdf?src-supplier=Augswan, ComponentLink1URL=https://datasheet.octopart.com:443/W25Q128JVSIQ-TR-Winbond-datasheet-138104337.pdf?src-supplier=Augswan, Interface="SPI, Serial", Manufacturer Part Number="W25Q128JVSIQ TR", Memory Format="FLASH, NOR", Pricing="1=3,72, 10=3,468, 25=3,3672, 50=3,29, 100=3,2127, 250=3,11104, 500=3,03472, 1000=2,95921 (USD)", RoHS=Compliant, Schedule B="8542320070, 8542320070|8542320070, 8542320070|8542320070|8542320070, 8542320070|8542320070|8542320070|8542320070", Stock=40140, Supplier=DigiKey